# Altium PCB LPCB280R0.PcbDoc (part 1 of 2)
Units mm, origin at the board's own origin, x right, y up, seen from the top; angles counter-clockwise.
Board outline 96 x 109 mm, 2 copper layers (Top Layer, Bottom Layer); 89 components, 73 nets, 288 pads, 730 vias.
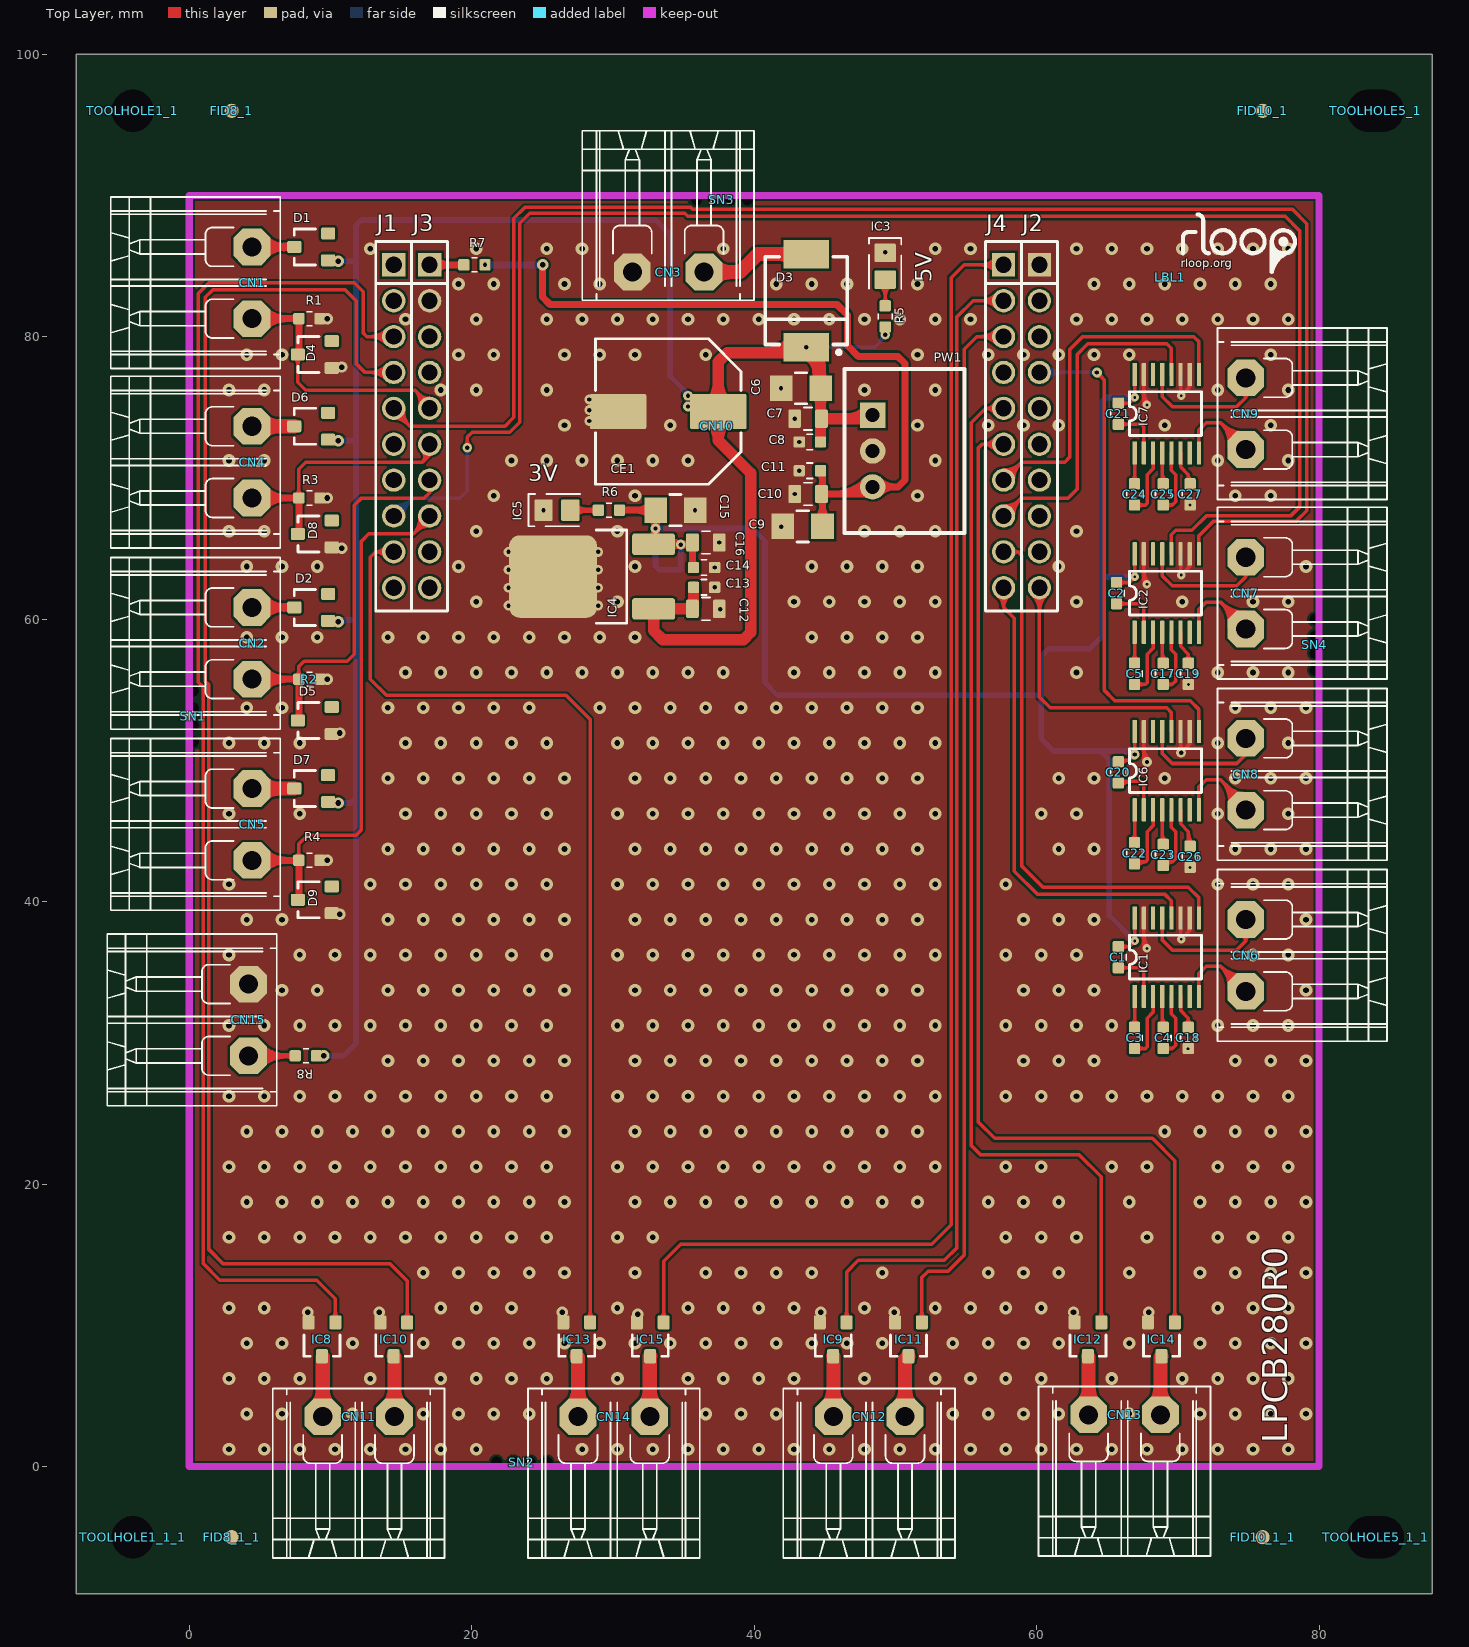
[diagram p0: Top Layer view]
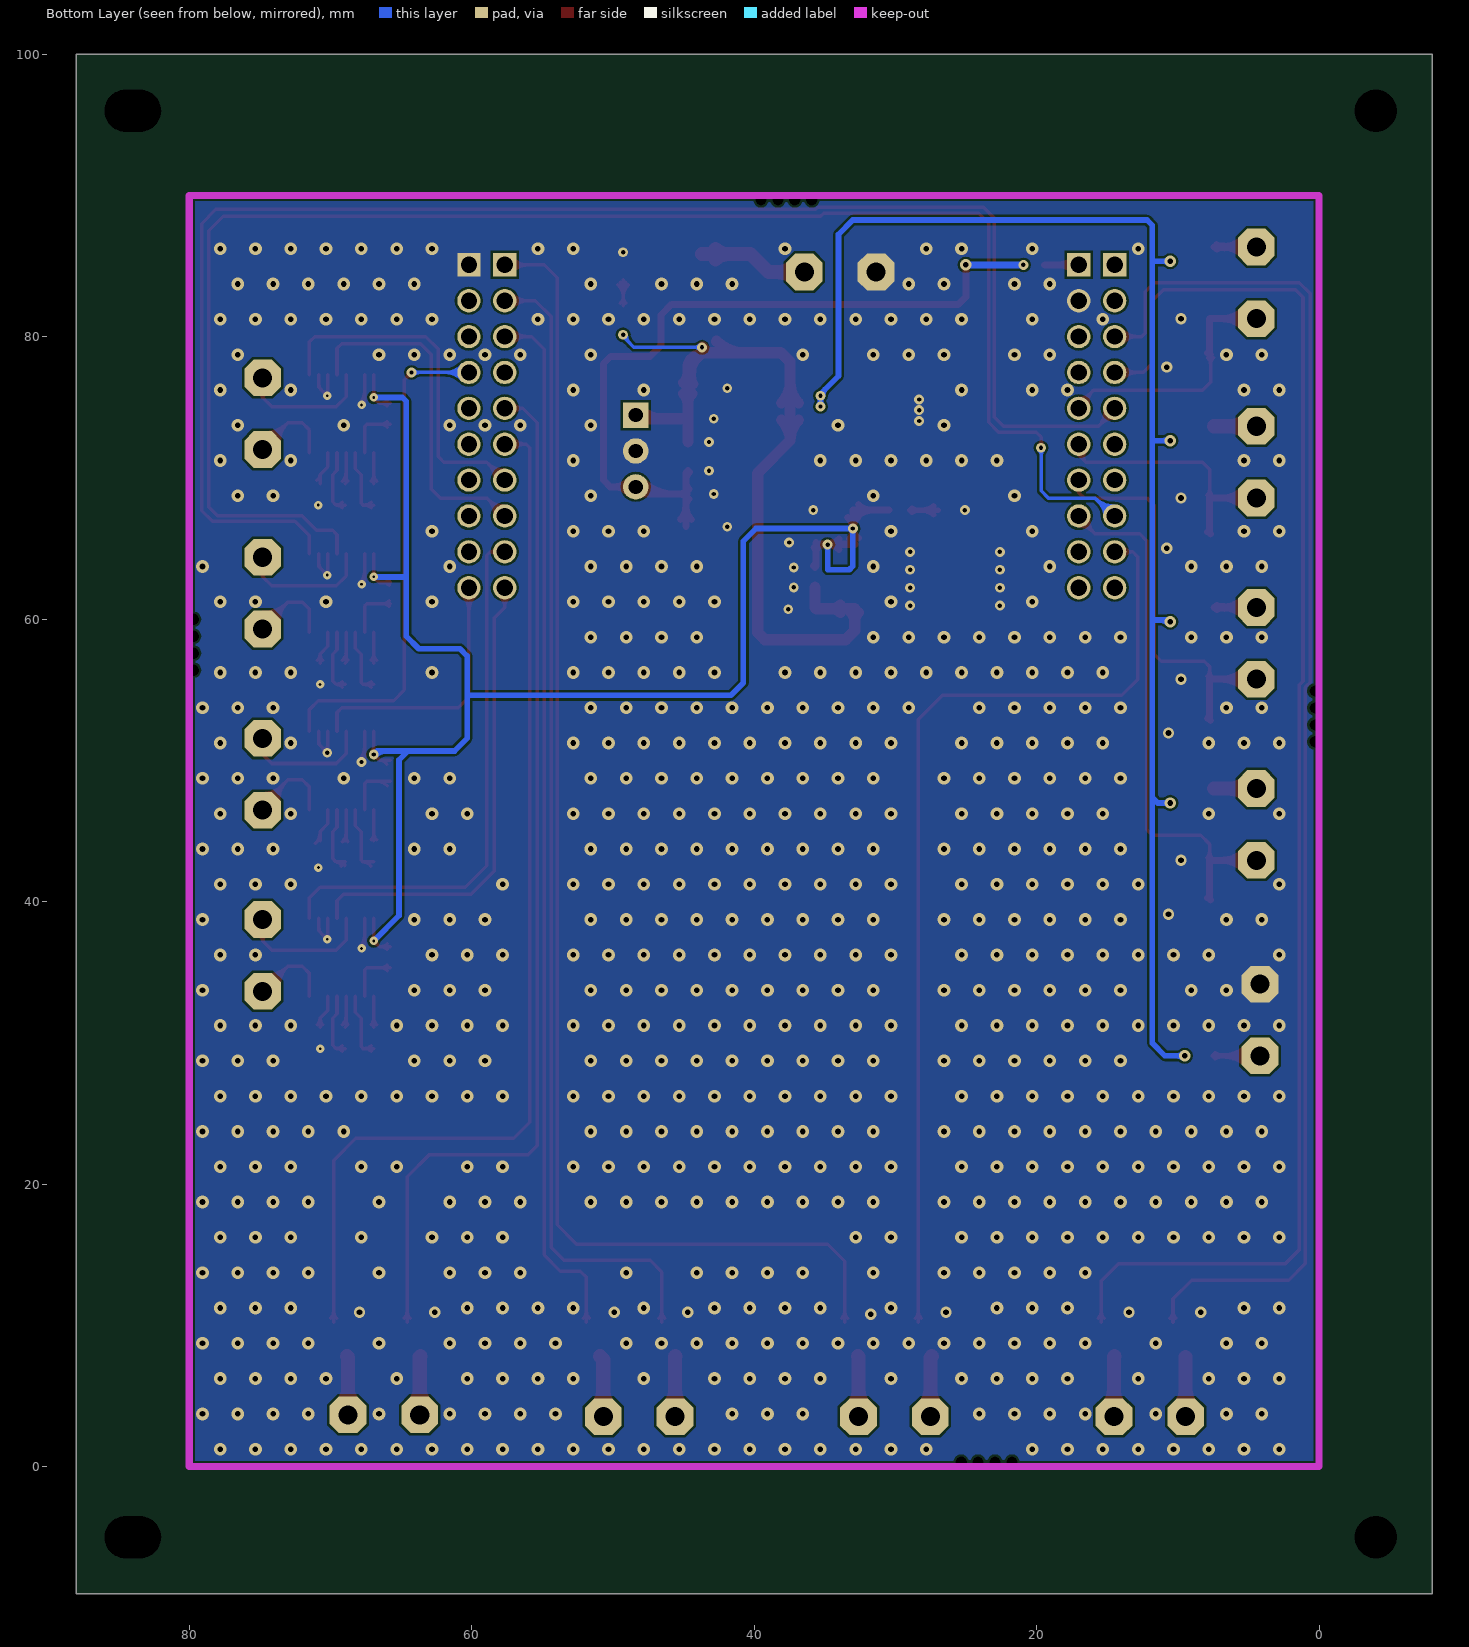
[diagram p1: Bottom Layer view, seen from below]

## Layer stack, top to bottom
Top Layer: signal copper 0.0356
Dielectric: dielectric 0.32, FR-4, Dk 4.8
Bottom Layer: signal copper 0.0356

## Board outline
-8,-9 -8,100 88,100 88,-9

## Design rules (kind name [scope] priority, off if disabled: settings)
Clearance [All] p1: gap=0.16
Height [All] p1 off: minheight=0 maxheight=25.4 prefheight=12.7
HoleSize [All] p1: absolutevalues=TRUE maxlimit=6 minlimit=0.025 maxpercent=80.000 minpercent=20.000
MinimumSolderMaskSliver [All] p1 off: minsoldermaskwidth=0.1
PlaneConnect PlaneConnect_1 [IsVia] p1: planeconnectstyle=Direct reliefexpansion=0.508 reliefentries=4 reliefconductorwidth=0.254 reliefairgap=0.254
PlaneConnect [All] p2: planeconnectstyle=Relief reliefexpansion=0.508 reliefentries=4 reliefconductorwidth=0.254 reliefairgap=0.254
PolygonConnect [IsVia] p1: connectstyle=Direct reliefconductorwidth=0.254 reliefentries=4 polygonreliefangle="90 Angle" airgapwidth=0.254
PolygonConnect PolygonConnect_1 [All] p2: connectstyle=Direct reliefconductorwidth=0.254 reliefentries=4 polygonreliefangle="90 Angle" airgapwidth=0.254
RoomDefinition "U_LPCB280 - DRIVERS" [InComponentClass('U_LPCB280 - DRIVERS')] p1: confinementstyle=ConfineIn formatcopy=TRUE lockcomponents=FALSE outline -154.685,-91.268 -103.885,-91.268 -103.885,-65.868 -154.685,-65.868
RoomDefinition "U_LPCB280 - ANALOG" [InComponentClass('U_LPCB280 - ANALOG')] p2: confinementstyle=ConfineIn formatcopy=TRUE lockcomponents=FALSE outline -154.685,-91.268 -103.885,-91.268 -103.885,-65.868 -154.685,-65.868
RoomDefinition "LPCB280 - TOP" [InComponentClass('LPCB280 - TOP')] p3: confinementstyle=ConfineIn formatcopy=TRUE lockcomponents=FALSE outline -154.685,-91.268 -103.885,-91.268 -103.885,-65.868 -154.685,-65.868
RoomDefinition "U_LPCB280 - POWER" [InComponentClass('U_LPCB280 - POWER')] p4: confinementstyle=ConfineIn formatcopy=TRUE lockcomponents=FALSE outline 169.038,80.563 204.979,80.563 204.979,130.855 169.038,130.855
RoomDefinition "U_LPCB280 - LIMIT SWITCHES" [InComponentClass('U_LPCB280 - LIMIT SWITCHES')] p5: confinementstyle=ConfineIn formatcopy=TRUE lockcomponents=FALSE outline 169.165,61.386 336.932,61.386 336.932,80.69 169.165,80.69
RoutingVias [All] p1: holewidth=0.6 width=1.2 viastyle="Through Hole" minholewidth=0.3 minwidth=0.6 maxholewidth=1 maxwidth=2
SilkToSilkClearance [All] p1 off: silktosilkclearance=0.1
SilkToSolderMaskClearance [IsPad] p1 off: minsilkscreentomaskgap=0.1 clearancetoexposedcopper=TRUE
SolderMaskExpansion [All] p1: expansion=0.102
Width [All] p1: maxlimit=1 minlimit=0.16 preferedwidth=0.2
22 further rules are at their usual default settings.

## Classes and differential pairs
component class "LPCB280 - TOP": LBL1 SN1 SN2 SN3 SN4
component class "U_LPCB280 - ANALOG": CN1 CN2 CN4 CN5 D1 D2 D4 D5 D6 D7 D8 D9 R1 R2 R3 R4
component class "U_LPCB280 - POWER": C6 C7 C8 C9 C10 C11 C12 C13 C14 C15 C16 CE1 CN3 D3 IC3 IC4 IC5 PW1 R5 R6
component class "U_LPCB280 - DRIVERS": CN11 CN12 CN13 CN14 CN15 IC8 IC9 IC10 IC11 IC12 IC13 IC14 IC15 R8
component class "U_LPCB280 - LIMIT SWITCHES": C1 C2 C3 C4 C5 C17 C18 C19 C20 C21 C22 C23 C24 C25 C26 C27 CN6 CN7 CN8 CN9 IC1 IC2 IC6 IC7
component class "U_LPCB280 - RM57 LAUNCH": CN10 R7

## Components (designator, comment, footprint, x,y, rotation, side; value= is the part's Value field where it differs from the comment)
C1 "100nF / 50V / 10% / SMD 0603" LFP011__CC1608-0603-IPC7351_B 65.786,36.068 r270 top
C2 "100nF / 50V / 10% / SMD 0603" LFP011__CC1608-0603-IPC7351_B 65.659,61.849 r270 top
C3 "100nF / 50V / 10% / SMD 0603" LFP011__CC1608-0603-IPC7351_B 66.929,30.353 r270 top
C4 "100nF / 50V / 10% / SMD 0603" LFP011__CC1608-0603-IPC7351_B 68.961,30.353 r270 top
C5 "100nF / 50V / 10% / SMD 0603" LFP011__CC1608-0603-IPC7351_B 66.929,56.134 r270 top
C6 "10uF / 50V / 10% / SMD 1206" LFP043__CC3216-1206 43.307,76.355 r180 top
C7 "1uF / 50V / 10% / SMD 0805" LFP010__CC2012-0805-IPC7351_B 43.815,74.196 r180 top
C8 "100nF / 50V / 10% / SMD 0603" LFP011__CC1608-0603-IPC7351_B 43.942,72.545 r180 top
C9 "10uF / 50V / 10% / SMD 1206" LFP043__CC3216-1206 43.434,66.576 r180 top
C10 "1uF / 50V / 10% / SMD 0805" LFP010__CC2012-0805-IPC7351_B 43.815,68.862 r180 top
C11 "100nF / 50V / 10% / SMD 0603" LFP011__CC1608-0603-IPC7351_B 43.942,70.513 r180 top
C12 "1uF / 50V / 10% / SMD 0805" LFP010__CC2012-0805-IPC7351_B 36.576,60.734 r0 top
C13 "100nF / 50V / 10% / SMD 0603" LFP011__CC1608-0603-IPC7351_B 36.449,62.258 r0 top
C14 "100nF / 50V / 10% / SMD 0603" LFP011__CC1608-0603-IPC7351_B 36.449,63.655 r0 top
C15 "10uF / 50V / 10% / SMD 1206" LFP043__CC3216-1206 34.417,67.719 r0 top
C16 "1uF / 50V / 10% / SMD 0805" LFP010__CC2012-0805-IPC7351_B 36.576,65.433 r0 top
C17 "100nF / 50V / 10% / SMD 0603" LFP011__CC1608-0603-IPC7351_B 68.961,56.134 r270 top
C18 "100nF / 50V / 10% / SMD 0603" LFP011__CC1608-0603-IPC7351_B 70.739,30.353 r270 top
C19 "100nF / 50V / 10% / SMD 0603" LFP011__CC1608-0603-IPC7351_B 70.739,56.134 r270 top
C20 "100nF / 50V / 10% / SMD 0603" LFP011__CC1608-0603-IPC7351_B 65.786,49.149 r270 top
C21 "100nF / 50V / 10% / SMD 0603" LFP011__CC1608-0603-IPC7351_B 65.786,74.549 r270 top
C22 "100nF / 50V / 10% / SMD 0603" LFP011__CC1608-0603-IPC7351_B 66.929,43.434 r270 top
C23 "100nF / 50V / 10% / SMD 0603" LFP011__CC1608-0603-IPC7351_B 68.961,43.307 r270 top
C24 "100nF / 50V / 10% / SMD 0603" LFP011__CC1608-0603-IPC7351_B 66.929,68.834 r270 top
C25 "100nF / 50V / 10% / SMD 0603" LFP011__CC1608-0603-IPC7351_B 68.961,68.834 r270 top
C26 "100nF / 50V / 10% / SMD 0603" LFP011__CC1608-0603-IPC7351_B 70.866,43.18 r270 top
C27 "100nF / 50V / 10% / SMD 0603" LFP011__CC1608-0603-IPC7351_B 70.866,68.834 r270 top
CE1 "330uF / 35V / 20% / SMD 10x10" LFP041__NICHICON_WT_10X10 33.909,74.704 r180 top
CN1 "691 313 510 002" "691 313 510 002" 4.445,86.36 r270 top
CN2 "691 313 510 002" "691 313 510 002" 4.445,60.833 r270 top
CN3 "691 313 510 002" "691 313 510 002" 36.449,84.582 r180 top
CN4 "691 313 510 002" "691 313 510 002" 4.445,73.66 r270 top
CN5 "691 313 510 002" "691 313 510 002" 4.445,48.006 r270 top
CN6 "691 313 510 002" "691 313 510 002" 74.803,33.655 r90 top locked
CN7 "691 313 510 002" "691 313 510 002" 74.803,59.309 r90 top locked
CN8 "691 313 510 002" "691 313 510 002" 74.803,46.482 r90 top locked
CN9 "691 313 510 002" "691 313 510 002" 74.803,72.009 r90 top locked
CN10 "RM57LAUNCHXL_BP_40P_1" RM57LAUNCHXL_BP_40P_1 14.478,85.09 r0 top locked
CN11 "691 313 510 002" "691 313 510 002" 9.451,3.537 r0 top
CN12 "691 313 510 002" "691 313 510 002" 45.604,3.537 r0 top
CN13 "691 313 510 002" "691 313 510 002" 63.68,3.664 r0 top
CN14 "691 313 510 002" "691 313 510 002" 27.527,3.537 r0 top
CN15 "691 313 510 002" "691 313 510 002" 4.191,34.163 r270 top locked
D1 "BAS16" LFP021__SOT23 8.636,86.36 r90 top
D2 "BAS16" LFP021__SOT23 8.636,60.833 r90 top
D3 "S3M-E3/57T" LFP040__DO-214AB 43.688,82.55 r90 top
D4 "MMBZ5226BLT1G" LFP021__SOT23 8.89,78.74 r90 top
D5 "MMBZ5226BLT1G" LFP021__SOT23 8.89,52.832 r90 top
D6 "BAS16" LFP021__SOT23 8.636,73.66 r90 top
D7 "BAS16" LFP021__SOT23 8.636,48.006 r90 top
D8 "MMBZ5226BLT1G" LFP021__SOT23 8.89,66.04 r90 top
D9 "MMBZ5226BLT1G" LFP021__SOT23 8.89,40.132 r90 top
FID8_1 "FIDUCIAL" LFP113__FIDUCIAL 3,96 r0 top
FID8_1_1 "FIDUCIAL" LFP113__FIDUCIAL 3,-5 r0 top
FID10_1 "FIDUCIAL" LFP113__FIDUCIAL 76,96 r0 top
FID10_1_1 "FIDUCIAL" LFP113__FIDUCIAL 76,-5 r0 top
IC1 "MAX3232CPWR" LFP049__TSSOP-16 69.215,36.068 r0 top
IC2 "MAX3232CPWR" LFP049__TSSOP-16 69.215,61.849 r0 top
IC3 "EL-17-21VGC/TR8" CR2012-0805-LED 49.276,84.991 r270 top
IC4 "NCV4274DT33RKG" LFP019__369A-13 28.321,63.02 r90 top
IC5 "EL-17-21VGC/TR8" CR2012-0805-LED 26.035,67.719 r0 top
IC6 "MAX3232CPWR" LFP049__TSSOP-16 69.215,49.276 r0 top
IC7 "MAX3232CPWR" LFP049__TSSOP-16 69.215,74.549 r0 top locked
IC8 "NUD3124LT1G" LFP021__SOT23 9.398,9.017 r180 top
IC9 "NUD3124LT1G" LFP021__SOT23 45.593,9.017 r180 top
IC10 "NUD3124LT1G" LFP021__SOT23 14.478,9.017 r180 top
IC11 "NUD3124LT1G" LFP021__SOT23 50.927,9.017 r180 top
IC12 "NUD3124LT1G" LFP021__SOT23 63.627,9.017 r180 top
IC13 "NUD3124LT1G" LFP021__SOT23 27.432,9.017 r180 top
IC14 "NUD3124LT1G" LFP021__SOT23 68.834,9.017 r180 top
IC15 "NUD3124LT1G" LFP021__SOT23 32.639,9.017 r180 top
LBL1 "RLOOP_LOGO" RLOOP_LOGO 69.469,84.201 r0 top
PW1 "173010542" 173010542 48.387,71.91 r270 top
R1 "160R / 0.1W / 1% / SMD 0603" LFP020__CR1608-0603-IPC7351_B 8.509,81.28 r180 top
R2 "160R / 0.1W / 1% / SMD 0603" LFP020__CR1608-0603-IPC7351_B 8.509,55.753 r180 top
R3 "160R / 0.1W / 1% / SMD 0603" LFP020__CR1608-0603-IPC7351_B 8.509,68.58 r180 top
R4 "160R / 0.1W / 1% / SMD 0603" LFP020__CR1608-0603-IPC7351_B 8.509,42.926 r180 top
R5 "2.2K / 0.1W / 1% / SMD 0603" LFP020__CR1608-0603-IPC7351_B 49.276,81.435 r270 top
R6 "2.2K / 0.1W / 1% / SMD 0603" LFP020__CR1608-0603-IPC7351_B 29.718,67.719 r0 top
R7 "0R / 0.1W / SMD 0603" LFP020__CR1608-0603-IPC7351_B 20.193,85.09 r0 top
R8 "0R / 0.1W / SMD 0603" LFP020__CR1608-0603-IPC7351_B 8.255,29.083 r0 top
SN1 "PCB_SNAPOUT_0.3MM" PCB_SNAPOUT_0.3MM 0,53.114 r270 top
SN2 "PCB_SNAPOUT_0.3MM" PCB_SNAPOUT_0.3MM 23.548,0 r0 top
SN3 "PCB_SNAPOUT_0.3MM" PCB_SNAPOUT_0.3MM 37.719,90 r180 top
SN4 "PCB_SNAPOUT_0.3MM" PCB_SNAPOUT_0.3MM 80,58.194 r90 top
TOOLHOLE1_1 "Comment" TOOL-1#1 -4,96 r0 top
TOOLHOLE1_1_1 "Comment" TOOL-1#1 -4,-5 r0 top
TOOLHOLE5_1 "Comment" TOOL-1#2 84,96 r0 top
TOOLHOLE5_1_1 "Comment" TOOL-1#2 84,-5 r0 top

## Footprints (in the part's own frame and the unit in brackets; to place one, negate y for a bottom-side part, rotate by r counter-clockwise, add the part's x,y. Pads: shape width x height; smd on the part's side, far side on the other; paste and mask are expansions set on the pad)
"691 313 510 002" [mm] "Connector, Pluggable Terminal Block, 5.08mm, 2 Way, PTH"
  oct 2.6x2.6 hole 1.35: 1(0,0) 2(5.08,0)
  silkscreen extent -3.54,-10 8.62,2
173010542 [mm]
  rect 1.8x1.8 hole 1 paste-0.01: 1(-2.54,0)
  round 1.8 hole 1 paste-0.01: 2(0,0) 3(2.54,0)
  silkscreen extent -5.8,-2 5.8,6.5
CR2012-0805-LED [mm]
  rrect10% 1.3x1.5 smd paste-0.05: A(0.95,0) K(-0.95,0)
  silkscreen extent -2.01,-1.14 1.63,1.14
LFP010__CC2012-0805-IPC7351_B [mm]
  rrect25% 0.9x1.3 smd paste-0.01: 1(-0.95,0) 2(0.95,0)
  silkscreen extent -0.3,-0.8 0.3,0.8
LFP011__CC1608-0603-IPC7351_B [mm]
  rrect25% 0.8x0.8 smd: 1(-0.75,0) 2(0.75,0)
  silkscreen extent -0.2,-0.55 0.2,0.55
LFP019__369A-13 [mil]
  rrect25% 60x120 smd: 1(-90,-179.49) 3(90,-179.49)
  rrect25% 230x245 smd paste-196.85: 4(0,100.75)
  silkscreen extent -130,-104 130,-19
LFP020__CR1608-0603-IPC7351_B [mm]
  rrect25% 0.8x0.8 smd: 1(-0.75,0) 2(0.75,0)
  silkscreen extent -0.2,-0.5 0.2,0.5
LFP021__SOT23 [mm] "SOT-23; 3 Leads; Body 3.0 x 2.5 mm, inc. leads (LxW max)"
  rrect25% 0.85x1 smd paste-0.05: 1(-0.95,-1.2) 2(0.95,-1.2) 3(0,1.2)
  silkscreen extent -1.27,-0.3 1.28,1.2
LFP040__DO-214AB [mm]
  rect 2.032x3.2 smd: 1(-3.3,0) 2(3.3,0)
  silkscreen extent -3.8,-2.9 3.1,2.9
LFP041__NICHICON_WT_10X10 [mm]
  rrect10% 4x2.5 smd paste-0.02: 1(-3.55,0) 2(3.55,0)
  silkscreen extent -5.15,-5.15 5.15,5.15
LFP043__CC3216-1206 [mm]
  rect 1.6x1.8 smd paste-0.01: 1(-1.4,0) 2(1.4,0)
  silkscreen extent -0.4,-1.1 0.4,1.1
LFP049__TSSOP-16 [mm] "Copied from 984E-02"
  rrect25% 0.3x1.65 smd paste-0.03: 1(-2.275,-2.775) 2(-1.625,-2.775) 3(-0.975,-2.775) 4(-0.325,-2.775) 5(0.325,-2.775) 6(0.975,-2.775) 7(1.625,-2.775) 8(2.275,-2.775) 9(2.275,2.775) 10(1.625,2.775) 11(0.975,2.775) 12(0.325,2.775) 13(-0.325,2.775) 14(-0.975,2.775) 15(-1.625,2.775) 16(-2.275,2.775)
  silkscreen extent -2.65,-1.55 2.45,1.55
LFP113__FIDUCIAL [mm]
  round 1 smd paste-2 mask+1.5: 0(0,0)
PCB_SNAPOUT_0.3MM [mm]
  round 0.4 hole 0.8 unplated: 0(-1.8,0.3) 0(-0.6,0.3) 0(0.6,0.3) 0(1.8,0.3)
RLOOP_LOGO [mm]
  silkscreen extent 0.89,0.39 8.82,4.45
RM57LAUNCHXL_BP_40P_1 [mm]
  rect 1.65x1.65 hole 1.15: J1_1(0,0) J2_1(45.72,0) J3_1(2.54,0) J4_1(43.18,0)
  round 1.65 hole 1.15: J1_2(0,-2.54) J1_3(0,-5.08) J1_4(0,-7.62) J1_5(0,-10.16) J1_6(0,-12.7) J1_7(0,-15.24) J1_8(0,-17.78) J1_9(0,-20.32) J1_10(0,-22.86) J2_2(45.72,-2.54) J2_3(45.72,-5.08) J2_4(45.72,-7.62) J2_5(45.72,-10.16) J2_6(45.72,-12.7) J2_7(45.72,-15.24) J2_8(45.72,-17.78) J2_9(45.72,-20.32) J2_10(45.72,-22.86) J3_2(2.54,-2.54) J3_3(2.54,-5.08) J3_4(2.54,-7.62) J3_5(2.54,-10.16) J3_6(2.54,-12.7) J3_7(2.54,-15.24) J3_8(2.54,-17.78) J3_9(2.54,-20.32) J3_10(2.54,-22.86) J4_2(43.18,-2.54) J4_3(43.18,-5.08) J4_4(43.18,-7.62) J4_5(43.18,-10.16) J4_6(43.18,-12.7) J4_7(43.18,-15.24) J4_8(43.18,-17.78) J4_9(43.18,-20.32) J4_10(43.18,-22.86)
  silkscreen extent -1.27,-24.51 46.99,1.65, body extent -1.27,-24.43 46.99,1.57, height 8.59
TOOL-1#1 [mm]
  round 2.54 hole 3 unplated: TOOL(0,0)
TOOL-1#2 [mm]
  round 0.076 hole 3 slot 4 at 0 deg unplated: TOOL1(0,0)

## Part data
C1 C2 C3 C4 C5 C8 C11 C13 C14 C17 C18 C19 C20 C21 C22 C23 C24 C25 C26 C27: "Capacitor, Ceramic Chip, 100nF (0.1uF), 50V, 5%, SMD 0603 [LCA016]"
C6 C9 C15: "Capacitor, Ceramic Chip, 10uF, 50V, X5R, 10%, SMD 1206 [LCA144]"
C7 C10 C12 C16: "Capacitor, Ceramic Chip, 1uF, 50V, SMD 0805 [LCA098]"
CE1: "Capacitor, Aluminum Electrolytic, 330uF, 35V, 20%, SMD (10mm x 10mm) [LCA071]"
CN1 CN2 CN3 CN4 CN5 CN6 CN7 CN8 CN9 CN11 CN12 CN13 CN14 CN15: "Connector, Pluggable Terminal Block, 5.08mm, 2 Way, PTH"
CN10: "Connector, RM57L843 LaunchXL, 40Pin Boosterpack Site1"
D1 D2 D6 D7: "Diode, Small Signal, 0.2A, 85V, SMD SOT-23 [LIC006]"
D3: "Diode, General Purpose Rectifier, 3A, 200V, SMD DO-214AB [LIC189]"
D4 D5 D8 D9: "Diode, Zener, 3.3V, 0.225W, SMD [LIC288]"
IC1 IC2 IC6 IC7: "IC, RS232 Line Driver, 3.3V, SMD TSSOP16 [LIC165]"
IC3 IC5: "LED, SMD, 0805 Green [LIC016]"
IC4: "IC, Voltage Regulator, 400mA, 3.3V LDO, SMD DPAK [LIC233]"
IC8 IC9 IC10 IC11 IC12 IC13 IC14 IC15: "IC, Relay Driver, 28V Industrial, SMD SOT23 [LIC292]"
R1 R2 R3 R4: "Resistor, Ceramic Chip, 160R, 0.1W, 1%, SMD 0603 [LRE253]"
R5 R6: "Resistor, Ceramic Chip, 2.2K, 0.1W, 1%, SMD 0603 [LRE027]"
R7 R8: "Resistor, Ceramic Chip, 0R, 0.1W, SMD 0603 [LRE026]"
SN1 SN2 SN3 SN4: "PCB Snapout + 0.3mm"

## Via types
v1: diameter 0.9, hole 0.4, Top Layer to Bottom Layer, tented both sides, 659 vias
v2: diameter 0.7, hole 0.3, Top Layer to Bottom Layer, tented both sides, 36 vias
v3: diameter 0.8, hole 0.4, Top Layer to Bottom Layer, tented both sides, 22 vias
v4: diameter 0.6, hole 0.2, Top Layer to Bottom Layer, tented both sides, 13 vias

## Nets (pads, with @x,y where several pads share a name; then routed paths per layer and width w, separated by ;. In a path a pad name is that pad's centre, name@x,y a point inside that pad or via, vN(x,y) a via of type N, cw(c..) or ccw(c..) an arc to the next point about the centre after c; other vN are vias at no path point)
D3V3: C1.1 C2.1 C14.1 C15.1 C16.1 C20.1 C21.1 IC1.16 IC2.16 IC4.3 IC6.16 IC7.16 R6.2 | length 141.6
  Top Layer w0.25: C1.1@65.786,36.818 66.536,36.818 v4(66.94,37.222) IC1.16@66.94,38.843 ; C20.1@65.786,50.026 66.536,50.026 ; C2.1@65.786,62.599 66.536,62.599 v4(66.94,63.003) IC2.16@66.94,64.624 ; C21.1@65.786,75.299 66.536,75.299 v4(66.94,75.703) IC7.16@66.94,77.324 ; C2.1@65.853,62.405 cw(c66.323,61.935) 66.323,62.599 cw(c66.323,63.263) C2.1@65.853,62.793 ; C1.1@65.98,36.624 cw(c66.45,36.154) 66.45,36.818 cw(c66.45,37.482) C1.1@65.98,37.012 ; C21.1@65.98,75.105 cw(c66.45,74.635) 66.45,75.299 cw(c66.45,75.963) C21.1@65.98,75.493 ; C20.1@66.015,49.747 cw(c66.536,49.4) 66.536,50.026 ; v2@66.715,50.43 cw(c66.172,50.43) 66.556,50.046 cw(c66.94,49.662) v2@66.94,50.205 ; v4@66.765,37.222 cw(c66.343,37.222) 66.641,36.923 cw(c66.94,36.625) v4@66.94,37.047 ; v4@66.765,63.003 cw(c66.343,63.003) 66.641,62.704 cw(c66.94,62.406) v4@66.94,62.828 ; v4@66.765,75.703 cw(c66.343,75.703) 66.641,75.404 cw(c66.94,75.106) v4@66.94,75.528 ; v2@66.781,50.589 ccw(c66.397,50.973) 66.94,50.973 ccw(c67.483,50.973) v2@67.099,50.589 ; v4@66.816,37.346 ccw(c66.518,37.644) 66.94,37.644 ccw(c67.362,37.644) v4@67.064,37.346 ; v4@66.816,63.127 ccw(c66.518,63.425) 66.94,63.425 ccw(c67.362,63.425) v4@67.064,63.127 ; v4@66.816,75.827 ccw(c66.518,76.125) 66.94,76.125 ccw(c67.362,76.125) v4@67.064,75.827 ; IC6.16@66.94,52.051 v2(66.94,50.43) 66.536,50.026
  Top Layer w0.5: R6.2@30.468,67.719 C15.1@33.017,67.719 v2(33.017,66.421) ; IC4.3@32.627,65.751 ccw(c32.247,66.421) v2(33.017,66.421) ; C15.1@32.628,67.33 ccw(c31.689,66.391) 31.689,67.719 ccw(c31.689,69.047) C15.1@32.628,68.108 ; C15.1@32.659,67.202 cw(c31.987,66.421) v2(33.017,66.421) ; v2@33.017,66.211 ccw(c33.785,66.211) IC4.3@33.242,65.668 ; IC4.3@33.061,66.047 cw(c33.473,66.158) v2@33.104,66.371 ; C15.1@33.375,67.202 ccw(c34.047,66.421) v2(33.017,66.421) ; IC4.3@34.004,64.944 cw(c34.878,64.07) 34.878,65.306 cw(c34.878,66.542) IC4.3@34.004,65.668 ; 34.466,65.416 cw(c34.361,65.026) v2@34.711,65.228 ; v2@34.848,65.191 cw(c35.09,64.773) C16.1@35.215,65.24 ; v2@34.967,65.306 cw(c34.967,64.574) 35.485,65.092 cw(c35.143,64.75) 35.626,64.75 cw(c36.109,64.75) C16.1@35.767,65.092 ; 35.626,64.193 ccw(c36.237,64.193) C14.1@35.805,63.761 ; C14.1@35.699,63.655 35.626,63.728 C16.1@35.626,65.433 35.499,65.306 IC4.3@32.88,65.306 33.017,65.443 v2(33.017,66.421)
  Bottom Layer w0.4: v2@32.911,66.315 cw(c32.655,66.059) 33.017,66.059 cw(c33.379,66.059) 33.123,66.315 cw(c33.379,66.059) 33.379,66.421 cw(c33.379,66.783) v2@33.123,66.527 ; v2@34.692,65.172 cw(c34.436,64.916) 34.798,64.916 cw(c35.16,64.916) v2@34.904,65.172 ; v2(34.798,65.278) 34.798,63.5 33.274,63.5 33.017,63.757 v2(33.017,66.421) 39.878,66.421 40.767,65.532 40.767,55.499 41.656,54.61 60.198,54.61 60.325,54.483 ; 65.991,50.673 cw(c65.991,49.481) v2@66.834,50.324 ; v4(66.94,37.222) 65.151,39.011 65.151,50.038 64.516,50.673 ; v2(66.94,50.43) 66.697,50.673 64.516,50.673 ; v4(66.94,63.003) 66.929,62.992 64.643,62.992 ; v4(66.94,75.703) 64.908,75.703 64.643,75.438 64.643,62.992 ; 60.325,54.483 60.325,51.562 61.214,50.673 64.516,50.673 ; 60.325,54.483 60.325,57.404 60.833,57.912 63.754,57.912 64.643,58.801 64.643,62.992
DGND: C6.2 C7.2 C8.2 C9.2 C10.2 C11.2 C12.2 C13.2 C14.2 C15.2 C16.2 C18.2 C19.2 C26.2 C27.2 CE1.2 CN3.2 CN10.J2_1 CN10.J3_2 CN15.1 D4.1 D5.1 D8.1 D9.1 IC1.10 IC1.11 IC1.15 IC2.10 IC2.11 IC2.15 IC3.K IC4.4 IC5.K IC6.10 IC6.11 IC6.15 IC7.10 IC7.11 IC7.15 IC8.2 IC9.2 IC10.2 IC11.2 IC12.2 IC13.2 IC14.2 IC15.2 PW1.2 R1.1 R2.1 R3.1 R4.1 | length 36.1
  Top Layer w0.25: 67.59,37.021 ccw(c68.136,37.021) v4@67.75,36.635 ; 67.59,37.625 ccw(c68.74,37.625) v4@67.927,36.812 ; IC1.15@67.59,38.843 67.59,36.931 ; 67.59,50.35 ccw(c68.257,50.35) v2@67.785,49.878 ; 67.59,50.953 ccw(c68.86,50.953) v2@67.962,50.055 ; IC6.15@67.59,52.051 67.59,50.139 v2@67.818,49.911 ; 67.59,62.802 ccw(c68.136,62.802) v4@67.75,62.416 ; 67.59,63.406 ccw(c68.74,63.406) v4@67.927,62.593 ; IC2.15@67.59,64.624 67.59,62.712 ; 67.59,75.502 ccw(c68.136,75.502) v4@67.75,75.116 ; 67.59,76.106 ccw(c68.74,76.106) v4@67.927,75.293 ; IC7.15@67.59,77.324 67.59,75.412 ; v4@67.636,36.741 ccw(c67.457,36.798) 67.59,36.931 ; v4@67.636,62.522 ccw(c67.457,62.579) 67.59,62.712 ; v4@67.636,75.222 ccw(c67.457,75.279) 67.59,75.412 ; v4@67.785,36.862 cw(c67.76,37.101) 67.59,36.931 ; v4@67.785,62.643 cw(c67.76,62.882) 67.59,62.712 ; v4@67.785,75.343 cw(c67.76,75.582) 67.59,75.412 ; v4@67.818,36.703 67.59,36.931 ; v4@67.818,62.484 67.59,62.712 ; v4@67.818,75.184 67.59,75.412 ; v2@70.072,50.705 ccw(c69.787,50.99) 70.19,50.99 ; v4@70.107,37.462 ccw(c69.907,37.662) 70.19,37.662 ; v4@70.107,63.243 ccw(c69.907,63.443) 70.19,63.443 ; v4@70.107,75.943 ccw(c69.907,76.143) 70.19,76.143 ; 70.19,37.859 ccw(c70.752,37.859) v4@70.355,37.462 ; IC1.11@70.19,38.843 v4@70.19,37.379 ; v2@70.19,50.587 IC6.11@70.19,52.051 ; 70.19,51.188 ccw(c70.873,51.188) v2@70.39,50.705 ; v4@70.19,63.16 IC2.11@70.19,64.624 ; 70.19,63.64 ccw(c70.752,63.64) v4@70.355,63.243 ; v4@70.19,75.86 IC7.11@70.19,77.324 ; 70.19,76.34 ccw(c70.752,76.34) v4@70.355,75.943 ; v4(70.231,37.338) v4@70.19,37.379 ; v4@70.231,37.513 ccw(c70.231,37.935) 70.53,37.637 ccw(c70.828,37.338) v4@70.406,37.338 ; v2@70.231,50.771 ccw(c70.231,51.314) 70.615,50.93 ccw(c70.999,50.546) v2@70.456,50.546 ; v4@70.231,63.294 ccw(c70.231,63.716) 70.53,63.418 ccw(c70.828,63.119) v4@70.406,63.119 ; v4@70.231,75.994 ccw(c70.231,76.416) 70.53,76.118 ccw(c70.828,75.819) v4@70.406,75.819 ; v2@70.272,50.587 70.84,51.155 IC6.10@70.84,52.051 ; v4@70.272,63.16 70.84,63.728 IC2.10@70.84,64.624 ; v4@70.272,75.86 70.84,76.428 IC7.10@70.84,77.324 ; 70.641,37.748 ccw(c70.221,38.168) IC1.10@70.815,38.168 ; 70.641,50.956 ccw(c70.221,51.376) IC6.10@70.815,51.376 ; 70.641,63.529 ccw(c70.221,63.949) IC2.10@70.815,63.949 ; 70.641,76.229 ccw(c70.221,76.649) IC7.10@70.815,76.649 ; IC1.10@70.84,38.843 70.84,37.947 70.272,37.379 v4@70.19,37.379
  other v1: 2.815,1.232 5.315,1.232 7.815,1.232 10.315,1.232 12.815,1.232 15.315,1.232 17.815,1.232 20.315,1.232 27.815,1.232 30.315,1.232 32.815,1.232 35.315,1.232 37.815,1.232 40.315,1.232 42.815,1.232 45.315,1.232 47.815,1.232 50.315,1.232 52.815,1.232 55.315,1.232 57.815,1.232 60.315,1.232 62.815,1.232 65.315,1.232 67.815,1.232 70.315,1.232 72.815,1.232 75.315,1.232 77.815,1.232 4.065,3.732 6.565,3.732 11.565,3.732 16.565,3.732 19.065,3.732 21.565,3.732 24.065,3.732 36.565,3.732 39.065,3.732 41.565,3.732 54.065,3.732 56.565,3.732 59.065,3.732 61.565,3.732 66.565,3.732 71.565,3.732 74.065,3.732 76.565,3.732 79.065,3.732 2.815,6.232 5.315,6.232 7.815,6.232 12.815,6.232 17.815,6.232 20.315,6.232 22.815,6.232 25.315,6.232 30.315,6.232 35.315,6.232 37.815,6.232 40.315,6.232 42.815,6.232 47.815,6.232 52.815,6.232 55.315,6.232 57.815,6.232 60.315,6.232 65.315,6.232 70.315,6.232 72.815,6.232 75.315,6.232 77.815,6.232 4.065,8.732 6.565,8.732 11.565,8.732 16.565,8.732 19.065,8.732 21.565,8.732 24.065,8.732 26.565,8.732 29.065,8.732 31.565,8.732 34.065,8.732 36.565,8.732 39.065,8.732 41.565,8.732 44.065,8.732 46.565,8.732 49.065,8.732 54.065,8.732 56.565,8.732 59.065,8.732 61.565,8.732 66.565,8.732 71.565,8.732 74.065,8.732 76.565,8.732 79.065,8.732 2.815,11.232 5.315,11.232 17.815,11.232 20.315,11.232 22.815,11.232 30.315,11.232 35.315,11.232 37.815,11.232 40.315,11.232 42.815,11.232 47.815,11.232 52.815,11.232 55.315,11.232 57.815,11.232 60.315,11.232 72.815,11.232 75.315,11.232 77.815,11.232 16.565,13.732 19.065,13.732 21.565,13.732 24.065,13.732 26.565,13.732 31.565,13.732 36.565,13.732 39.065,13.732 41.565,13.732 44.065,13.732 49.065,13.732 56.565,13.732 59.065,13.732 61.565,13.732 66.565,13.732 71.565,13.732 74.065,13.732 76.565,13.732 79.065,13.732 2.815,16.232 5.315,16.232 7.815,16.232 10.315,16.232 12.815,16.232 15.315,16.232 17.815,16.232 20.315,16.232 22.815,16.232 25.315,16.232 30.315,16.232 32.815,16.232 57.815,16.232 60.315,16.232 62.815,16.232 67.815,16.232 72.815,16.232 75.315,16.232 77.815,16.232 4.065,18.732 6.565,18.732 9.065,18.732 11.565,18.732 14.065,18.732 16.565,18.732 19.065,18.732 21.565,18.732 24.065,18.732 26.565,18.732 31.565,18.732 34.065,18.732 36.565,18.732 39.065,18.732 41.565,18.732 44.065,18.732 46.565,18.732 49.065,18.732 51.565,18.732 56.565,18.732 59.065,18.732 61.565,18.732 66.565,18.732 71.565,18.732 74.065,18.732 76.565,18.732 79.065,18.732 2.815,21.232 5.315,21.232 7.815,21.232 10.315,21.232 12.815,21.232 15.315,21.232 17.815,21.232 20.315,21.232 22.815,21.232 25.315,21.232 30.315,21.232 32.815,21.232 35.315,21.232 37.815,21.232 40.315,21.232 42.815,21.232 45.315,21.232 47.815,21.232 50.315,21.232 52.815,21.232 57.815,21.232 60.315,21.232 65.315,21.232 67.815,21.232 72.815,21.232 75.315,21.232 77.815,21.232 4.065,23.732 6.565,23.732 9.065,23.732 11.565,23.732 14.065,23.732 16.565,23.732 19.065,23.732 21.565,23.732 24.065,23.732 26.565,23.732 31.565,23.732 34.065,23.732 36.565,23.732 39.065,23.732 41.565,23.732 44.065,23.732 46.565,23.732 49.065,23.732 51.565,23.732 69.065,23.732 71.565,23.732 74.065,23.732 76.565,23.732 79.065,23.732 2.815,26.232 5.315,26.232 7.815,26.232 10.315,26.232 12.815,26.232 15.315,26.232 17.815,26.232 20.315,26.232 22.815,26.232 25.315,26.232 30.315,26.232 32.815,26.232 35.315,26.232 37.815,26.232 40.315,26.232 42.815,26.232 45.315,26.232 47.815,26.232 50.315,26.232 52.815,26.232 57.815,26.232 60.315,26.232 62.815,26.232 65.315,26.232 67.815,26.232 70.315,26.232 72.815,26.232 75.315,26.232 77.815,26.232 14.065,28.732 16.565,28.732 19.065,28.732 21.565,28.732 24.065,28.732 26.565,28.732 31.565,28.732 34.065,28.732 36.565,28.732 39.065,28.732 41.565,28.732 44.065,28.732 46.565,28.732 49.065,28.732 51.565,28.732 59.065,28.732 61.565,28.732 64.065,28.732 74.065,28.732 76.565,28.732 79.065,28.732 2.815,31.232 5.315,31.232 7.815,31.232 10.315,31.232 12.815,31.232 15.315,31.232 17.815,31.232 20.315,31.232 22.815,31.232 25.315,31.232 30.315,31.232 32.815,31.232 35.315,31.232 37.815,31.232 40.315,31.232 42.815,31.232 45.315,31.232 47.815,31.232 50.315,31.232 52.815,31.232 57.815,31.232 60.315,31.232 62.815,31.232 65.315,31.232 72.815,31.232 75.315,31.232 77.815,31.232 6.565,33.732 9.065,33.732 14.065,33.732 16.565,33.732 19.065,33.732 21.565,33.732 24.065,33.732 26.565,33.732 31.565,33.732 34.065,33.732 36.565,33.732 39.065,33.732 41.565,33.732 44.065,33.732 46.565,33.732 49.065,33.732 51.565,33.732 59.065,33.732 61.565,33.732 64.065,33.732 79.065,33.732 2.815,36.232 7.815,36.232 10.315,36.232 12.815,36.232 15.315,36.232 17.815,36.232 20.315,36.232 22.815,36.232 25.315,36.232 30.315,36.232 32.815,36.232 35.315,36.232 37.815,36.232 40.315,36.232 42.815,36.232 45.315,36.232 47.815,36.232 50.315,36.232 52.815,36.232 57.815,36.232 60.315,36.232 62.815,36.232 75.315,36.232 77.815,36.232 4.065,38.732 6.565,38.732 14.065,38.732 16.565,38.732 19.065,38.732 21.565,38.732 24.065,38.732 26.565,38.732 31.565,38.732 34.065,38.732 36.565,38.732 39.065,38.732 41.565,38.732 44.065,38.732 46.565,38.732 49.065,38.732 51.565,38.732 59.065,38.732 61.565,38.732 64.065,38.732 79.065,38.732 2.815,41.232 12.815,41.232 15.315,41.232 17.815,41.232 20.315,41.232 22.815,41.232 25.315,41.232 30.315,41.232 32.815,41.232 35.315,41.232 37.815,41.232 40.315,41.232 42.815,41.232 45.315,41.232 47.815,41.232 50.315,41.232 52.815,41.232 57.815,41.232 72.815,41.232 75.315,41.232 77.815,41.232 14.065,43.732 16.565,43.732 19.065,43.732 21.565,43.732 24.065,43.732 26.565,43.732 31.565,43.732 34.065,43.732 36.565,43.732 39.065,43.732 41.565,43.732 44.065,43.732 46.565,43.732 49.065,43.732 51.565,43.732 61.565,43.732 64.065,43.732 74.065,43.732 76.565,43.732 79.065,43.732 2.815,46.232 7.815,46.232 15.315,46.232 17.815,46.232 20.315,46.232 22.815,46.232 25.315,46.232 30.315,46.232 32.815,46.232 35.315,46.232 37.815,46.232 40.315,46.232 42.815,46.232 45.315,46.232 47.815,46.232 50.315,46.232 52.815,46.232 60.315,46.232 62.815,46.232 72.815,46.232 77.815,46.232 14.065,48.732 16.565,48.732 19.065,48.732 21.565,48.732 24.065,48.732 26.565,48.732 31.565,48.732 34.065,48.732 36.565,48.732 39.065,48.732 41.565,48.732 44.065,48.732 46.565,48.732 49.065,48.732 51.565,48.732 61.565,48.732 64.065,48.732 69.065,48.732 74.065,48.732 76.565,48.732 79.065,48.732 2.815,51.232 5.315,51.232 7.815,51.232 15.315,51.232 17.815,51.232 20.315,51.232 22.815,51.232 25.315,51.232 30.315,51.232 32.815,51.232 35.315,51.232 37.815,51.232 40.315,51.232 42.815,51.232 45.315,51.232 47.815,51.232 50.315,51.232 52.815,51.232 72.815,51.232 77.815,51.232 4.065,53.732 6.565,53.732 14.065,53.732 16.565,53.732 19.065,53.732 21.565,53.732 24.065,53.732 29.065,53.732 31.565,53.732 34.065,53.732 36.565,53.732 39.065,53.732 41.565,53.732 44.065,53.732 46.565,53.732 49.065,53.732 51.565,53.732 74.065,53.732 76.565,53.732 79.065,53.732 15.315,56.232 17.815,56.232 20.315,56.232 22.815,56.232 25.315,56.232 27.815,56.232 30.315,56.232 32.815,56.232 35.315,56.232 37.815,56.232 42.815,56.232 45.315,56.232 47.815,56.232 50.315,56.232 52.815,56.232 62.815,56.232 72.815,56.232 75.315,56.232 77.815,56.232 4.065,58.732 6.565,58.732 9.065,58.732 14.065,58.732 16.565,58.732 19.065,58.732 21.565,58.732 24.065,58.732 26.565,58.732 29.065,58.732 31.565,58.732 44.065,58.732 46.565,58.732 49.065,58.732 51.565,58.732 20.315,61.232 30.315,61.232 42.815,61.232 45.315,61.232 47.815,61.232 50.315,61.232 52.815,61.232 62.815,61.232 70.315,61.232 75.315,61.232 77.815,61.232 4.065,63.732 6.565,63.732 9.065,63.732 19.065,63.732 31.565,63.732 44.065,63.732 46.565,63.732 49.065,63.732 51.565,63.732 61.565,63.732 79.065,63.732 2.815,66.232 5.315,66.232 20.315,66.232 30.315,66.232 47.815,66.232 50.315,66.232 52.815,66.232 62.815,66.232 21.565,68.732 31.565,68.732 51.565,68.732 74.065,68.732 76.565,68.732 2.815,71.232 5.315,71.232 22.815,71.232 25.315,71.232 27.815,71.232 30.315,71.232 32.815,71.232 35.315,71.232 52.815,71.232 72.815,71.232 77.815,71.232 26.565,73.732 34.065,73.732 51.565,73.732 56.565,73.732 59.065,73.732 61.565,73.732 69.065,73.732 76.565,73.732 2.815,76.232 5.315,76.232 17.815,76.232 20.315,76.232 25.315,76.232 47.815,76.232 52.815,76.232 72.815,76.232 77.815,76.232 4.065,78.732 6.565,78.732 19.065,78.732 21.565,78.732 26.565,78.732 29.065,78.732 31.565,78.732 36.565,78.732 51.565,78.732 56.565,78.732 59.065,78.732 61.565,78.732 64.065,78.732 66.565,78.732 76.565,78.732 15.315,81.232 20.315,81.232 25.315,81.232 27.815,81.232 30.315,81.232 32.815,81.232 35.315,81.232 37.815,81.232 40.315,81.232 42.815,81.232 45.315,81.232 47.815,81.232 50.315,81.232 52.815,81.232 55.315,81.232 62.815,81.232 65.315,81.232 67.815,81.232 70.315,81.232 72.815,81.232 75.315,81.232 77.815,81.232 19.065,83.732 21.565,83.732 26.565,83.732 29.065,83.732 41.565,83.732 44.065,83.732 46.565,83.732 51.565,83.732 64.065,83.732 66.565,83.732 69.065,83.732 71.565,83.732 74.065,83.732 76.565,83.732 12.815,86.232 20.315,86.232 25.315,86.232 27.815,86.232 37.815,86.232 52.815,86.232 55.315,86.232 62.815,86.232 65.315,86.232 67.815,86.232 70.315,86.232 72.815,86.232 75.315,86.232 77.815,86.232
  other v2: 67.803,49.896 70.231,50.546 37.592,60.706 22.606,60.96 28.956,60.96 22.606,62.23 28.956,62.23 37.199,62.258 22.606,63.5 28.956,63.5 37.199,63.655 22.606,64.77 28.956,64.77 37.526,65.433 41.91,66.548 25.085,67.719 35.817,67.719 42.865,68.862 43.192,70.513 43.192,72.545 28.321,74.041 42.865,74.196 28.321,74.803 28.321,75.565 41.907,76.355 49.276,85.979
  other v3: 31.75,10.795 8.382,10.922 13.462,10.922 26.416,10.922 44.704,10.922 49.911,10.922 62.611,10.922 67.945,10.922 10.668,39.116 9.779,42.926 10.668,51.943 9.779,55.753 10.795,65.024 9.779,68.58 10.795,77.851 9.779,81.28
  other v4: 70.724,29.588 67.803,36.688 70.851,42.415 70.739,55.384 67.803,62.469 70.231,63.119 70.866,68.084 67.803,75.169 70.231,75.819
DIR_1: CN10.J1_4 IC10.1 | length 109.5
  Top Layer w0.25: CN10.J1_4@13.983,76.975 ccw(c12.788,75.78) 12.788,77.47 ccw(c12.788,79.16) CN10.J1_4@13.983,77.965 ; CN10.J1_4@14.16,77.152 ccw(c13.392,76.384) 13.392,77.47 ccw(c13.392,78.556) CN10.J1_4@14.16,77.788 ; CN10.J1_4@14.478,77.47 12.446,77.47 11.811,78.105 11.811,82.55 11.049,83.312 1.651,83.312 1.143,82.804 1.143,55.62 1.395,55.368 1.395,15.369 2.413,14.351 14.224,14.351 15.428,13.147 IC10.1@15.428,10.217 ; IC10.1@15.216,10.504 ccw(c14.704,11.016) 15.428,11.016 ccw(c16.152,11.016) IC10.1@15.64,10.504
DIR_2: CN10.J4_6 IC14.1 | length 80.9
  Top Layer w0.25: CN10.J4_6@57.127,71.934 ccw(c56.134,71.081) 56.134,72.39 ; CN10.J4_6@57.127,72.846 cw(c56.134,73.699) 56.134,72.39 ; CN10.J4_6@57.317,72.097 ccw(c56.678,71.549) 56.678,72.39 ccw(c56.678,73.231) CN10.J4_6@57.317,72.683 ; CN10.J4_6@57.658,72.39 56.134,72.39 ; IC14.1@69.572,10.504 ccw(c69.06,11.016) 69.784,11.016 ccw(c70.508,11.016) IC14.1@69.996,10.504 ; IC14.1@69.784,10.217 69.784,21.656 68.199,23.241 57.023,23.241 55.88,24.384 55.88,72.136 56.134,72.39
DIR_3: CN10.J1_9 IC13.1 | length 75.5
  Top Layer w0.25: 12.827,58.674 12.827,55.753 ; CN10.J1_9@13.886,64.396 ccw(c13.208,63.968) 13.208,64.77 ; CN10.J1_9@13.886,65.144 cw(c13.208,65.572) 13.208,64.77 ; CN10.J1_9@14.478,64.77 13.208,64.77 ; IC13.1@28.17,10.504 ccw(c27.658,11.016) 28.382,11.016 ccw(c29.106,11.016) IC13.1@28.594,10.504 ; IC13.1@28.382,10.217 28.382,52.898 26.67,54.61 13.97,54.61 12.827,55.753 ; 12.827,55.753 12.827,64.389 13.208,64.77
DIR_4: CN10.J4_3 IC11.1 | length 79.6
  Top Layer w0.25: IC11.1@51.665,10.504 ccw(c51.153,11.016) 51.877,11.016 ccw(c52.601,11.016) IC11.1@52.089,10.504 ; IC11.1@51.877,10.217 51.877,13.396 52.324,13.843 53.721,13.843 54.864,14.986 54.864,79.121 55.753,80.01 CN10.J4_3@57.658,80.01 ; CN10.J4_3@57.163,79.515 ccw(c55.968,78.32) 55.968,80.01 ccw(c55.968,81.7) CN10.J4_3@57.163,80.505 ; CN10.J4_3@57.34,79.692 ccw(c56.572,78.924) 56.572,80.01 ccw(c56.572,81.096) CN10.J4_3@57.34,80.328
NetC1_2: C1.2 IC1.2 | length 4.8
  Top Layer w0.25: C1.2@65.786,35.318 67.425,35.318 67.59,35.153 IC1.2@67.59,33.293 ; C1.2@65.98,35.124 cw(c66.45,34.654) 66.45,35.318 cw(c66.45,35.982) C1.2@65.98,35.512
NetC2_2: C2.2 IC2.2 | length 4.8
  Top Layer w0.25: C2.2@65.786,61.099 67.425,61.099 67.59,60.934 IC2.2@67.59,59.074 ; C2.2@65.853,60.905 cw(c66.323,60.435) 66.323,61.099 cw(c66.323,61.763) C2.2@65.853,61.293
NetC3_1: C3.1 IC1.1 | length 3.2
  Top Layer w0.25: C3.1@66.735,31.297 ccw(c66.239,31.793) 66.94,31.793 ; C3.1@66.929,31.103 66.94,31.114 IC1.1@66.94,33.293 ; 66.94,31.74 ccw(c67.566,31.74) C3.1@67.123,31.297
NetC3_2: C3.2 IC1.3 | length 5.7
  Top Layer w0.25: C3.2@66.929,29.603 67.703,29.603 67.818,29.718 67.818,31.75 68.24,32.172 IC1.3@68.24,33.293 ; C3.2@67.123,29.409 cw(c67.593,28.939) 67.593,29.603 cw(c67.593,30.267) C3.2@67.123,29.797